# Altium PCB PCB_Sensor_v2.PcbDoc
Units mm, origin at the board's own origin, x right, y up, seen from the top; angles counter-clockwise.
Board outline 25 x 25 mm, 6 copper layers (Top Layer, ground, MidLayer1, MidLayer2, Power, Bottom Layer); 26 components, 45 nets, 144 pads, 68 vias.
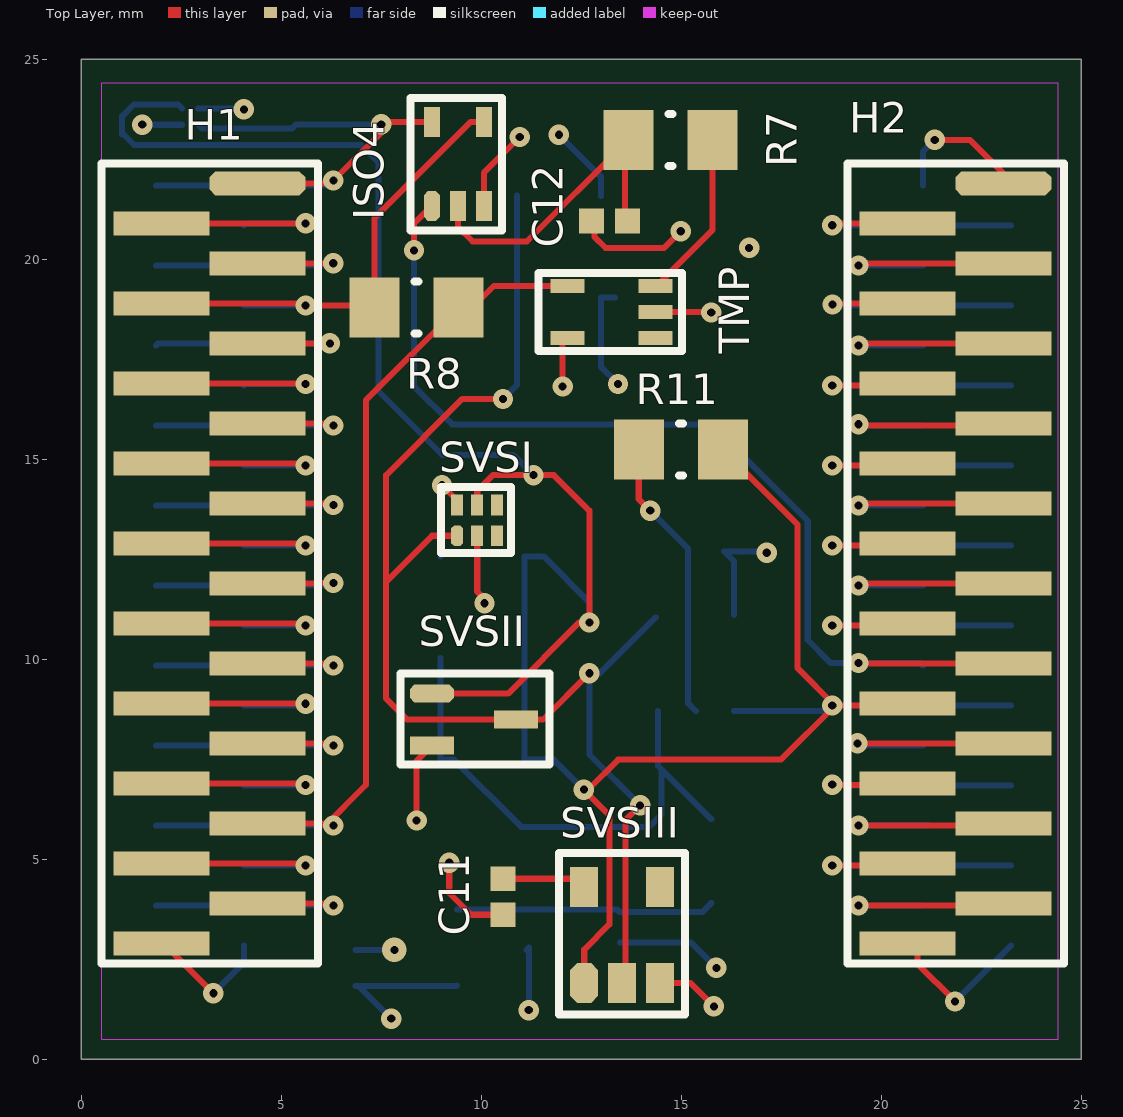
[diagram p0: Top Layer view]
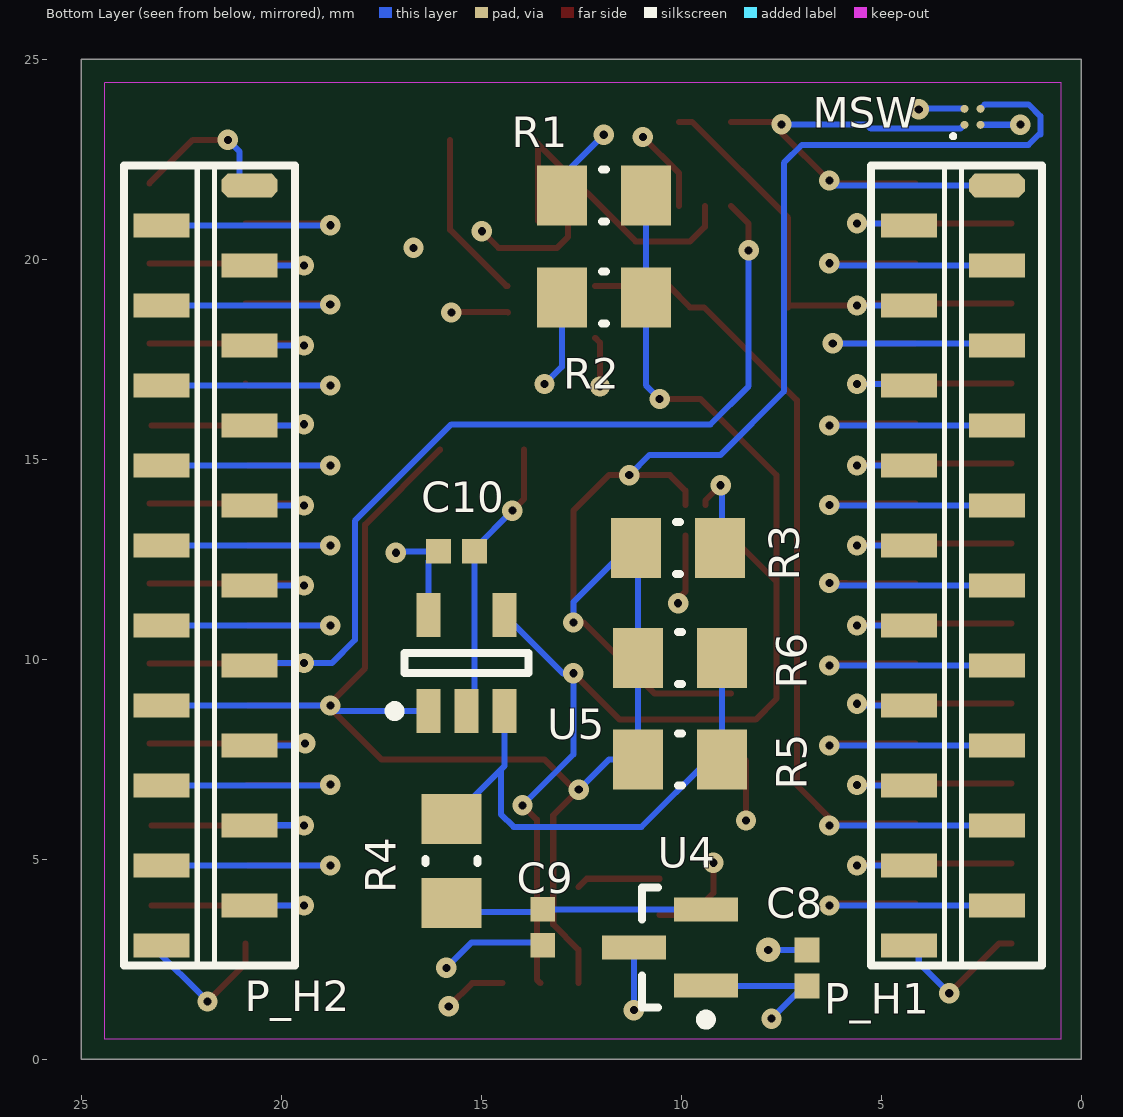
[diagram p1: Bottom Layer view, seen from below]
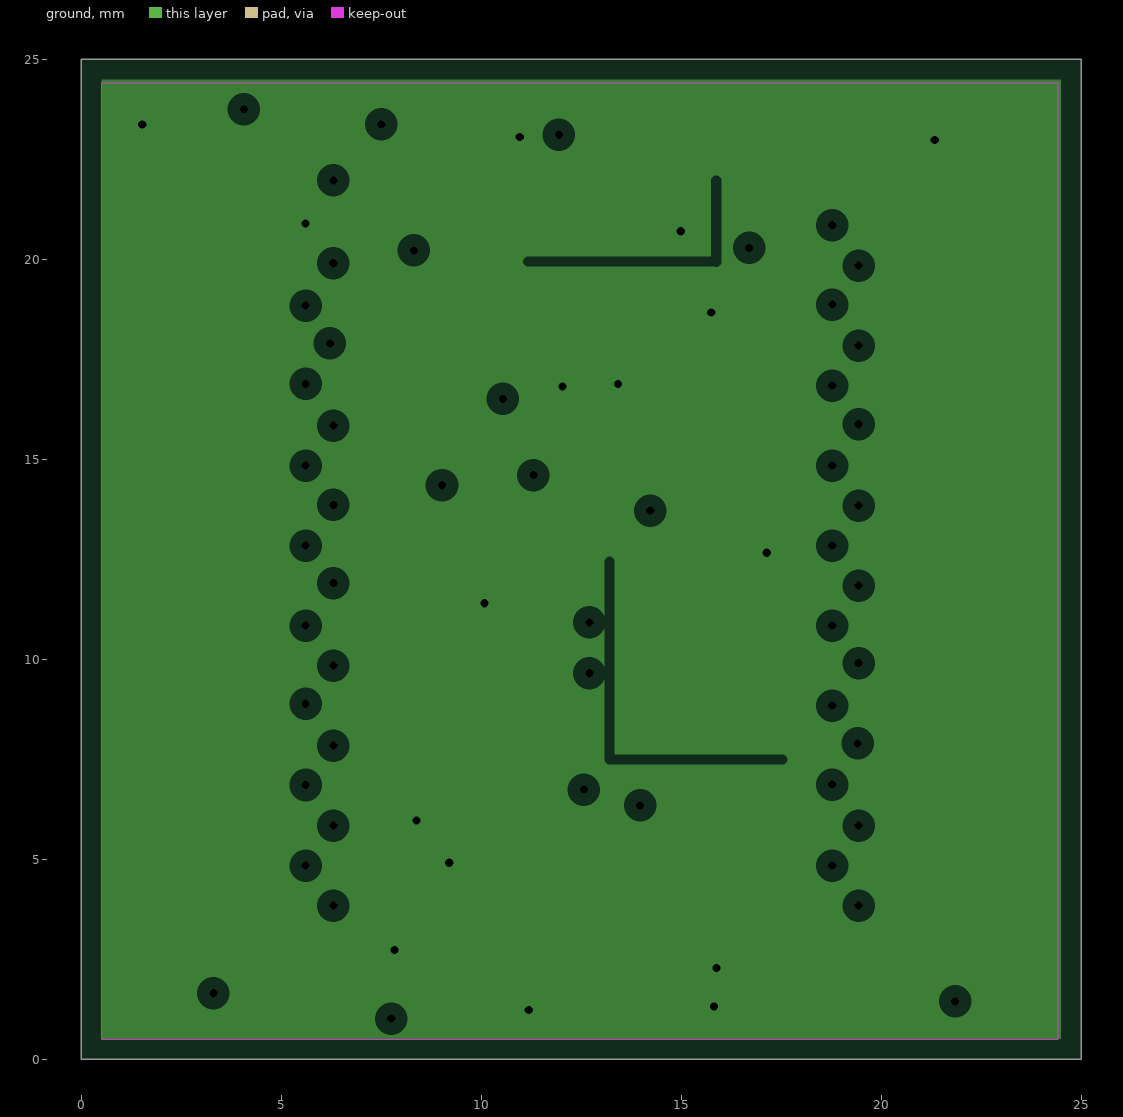
[diagram p2: ground, clearances drawn from the general rule]
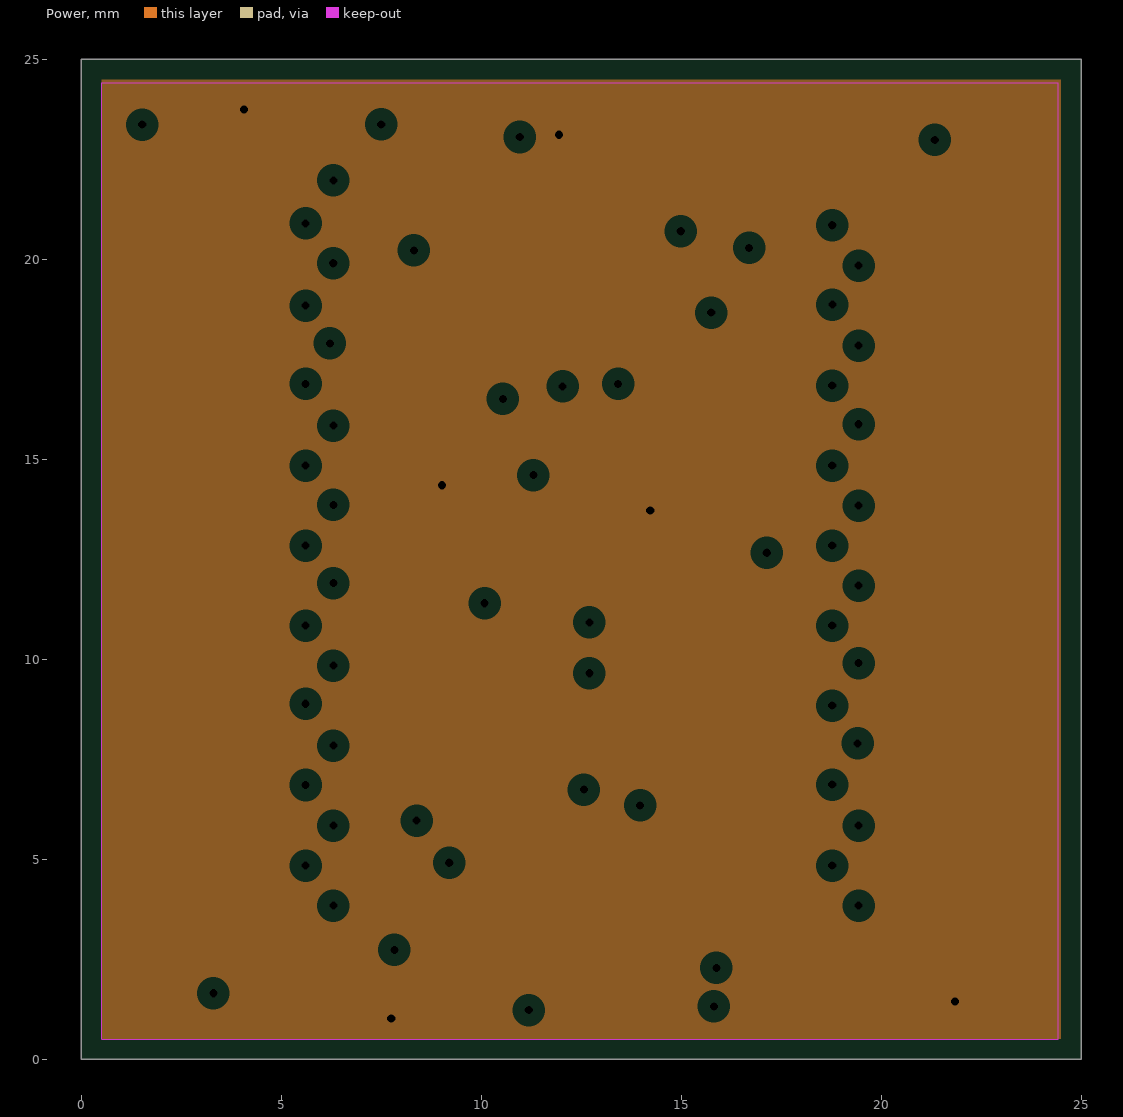
[diagram p3: Power, clearances drawn from the general rule]

## Layer stack, top to bottom
Top Layer: signal copper 0.0356
Dielectric: core 0.32, FR-4, Dk 4.8
ground: plane copper 0.0356, net GND
Dielectric: prepreg 0.32, FR-4, Dk 4.8
MidLayer1: signal copper 0.0356
Dielectric: core 0.32, FR-4, Dk 4.8
MidLayer2: signal copper 0.0356
Dielectric: prepreg 0.32, FR-4, Dk 4.8
Power: plane copper 0.0356, net E220
Dielectric: core 0.32, FR-4, Dk 4.8
Bottom Layer: signal copper 0.0356

## Board outline
0,0 25,0 25,25 0,25

## Design rules (kind name [scope] priority, off if disabled: settings)
Clearance "Clearance~Sunstone Circuits" [All] p1: gap=0.152 // Sunstone Circuits Minimum Clearance Rule (MLB~4&6 Layer Designs)
HoleSize "HoleSize~Sunstone Circuits" [All] p1: absolutevalues=TRUE maxlimit=6.375 minlimit=0.203 maxpercent=80.000 minpercent=20.000 // Sunstone Circuits Hole Size Rule (MLB~4&6 Layer Designs)
HoleSize Testpoint [All] p2: absolutevalues=TRUE maxlimit=2.54 minlimit=0.025 maxpercent=80.000 minpercent=20.000
HoleSize TestPointUsage [All] p3: absolutevalues=TRUE maxlimit=2.54 minlimit=0.025 maxpercent=80.000 minpercent=20.000
MinimumAnnularRing "MinimumAnnularRing~Sunstone Circuits" [All] p1: minimumring=0.152 // Sunstone Circuits Minimum Annular Ring (MLB~4&6 Layer Designs)
MinimumSolderMaskSliver [All] p1: minsoldermaskwidth=0.076
PlaneClearance "PlaneClearance~Sunstone Circuits" [All] p1: clearance=0.305 // Sunstone Circuits Power Plane Clearance Rule (MLB~4&6 Layer Designs)
PlaneConnect "PlaneConnect~Sunstone Circuits" [All] p1: planeconnectstyle=Relief reliefexpansion=0.254 reliefentries=4 reliefconductorwidth=0.203 reliefairgap=0.254 // Sunstone Circuits Power Plane Connect Rule (MLB~4&6 Layer Designs)
PolygonConnect "PolygonConnect~Sunstone Circuits" [All] p1: connectstyle=Relief reliefconductorwidth=0.203 reliefentries=4 polygonreliefangle="90 Angle" airgapwidth=0.254 // Sunstone Circuits Polygon Connect Style (MLB~4&6 Layer Designs)
RoutingVias "RoutingVias~Sunstone Circuits" [All] p1: holewidth=0.203 width=0.508 viastyle="Through Hole" minholewidth=0.203 minwidth=0.508 maxholewidth=0.203 maxwidth=0.508 // Sunstone Circuits Routing Vias Rule (MLB~4&6 Layer Designs)
ShortCircuit "ShortCircuit~Sunstone Circuits" [All] p1: allowed=FALSE // Sunstone Circuits Short Circuit Rule~Do Not Allow (MLB~4&6 Layer Designs)
SolderMaskExpansion "SolderMaskExpansion~Sunstone Circuits" [All] p1: expansion=0.076 // Sunstone Circuits Solder Mask Expansion Rule (MLB~4&6 Layer Designs)
ViasUnderSMD "ViasUnderSMD~Sunstone Circuits" [All] p1: allowed=FALSE // Sunstone Circuits Vias Under SMD~Do Not Allow (MLB~4&6 Layer Designs)
Width "Width~Sunstone Circuits" [All] p1: maxlimit=2.54 minlimit=0.152 preferedwidth=0.254 // Sunstone Circuits Minimum Width Rule (MLB~4&6 Layer Designs)
23 further rules are at their usual default settings.

## Classes and differential pairs
component class "Power Control": C8 C9 C10 MSW R1 R2 R3 R4 R5 R6 U4 U5
component class Sensor: C12 H1 H2 ISO4 P_H1 P_H2 R7 R8 TMP
component class SVS: C11 R11 SVSI SVSII SVSIII

## Components (designator, comment, footprint, x,y, rotation, side; value= is the part's Value field where it differs from the comment)
C8 "CAP 1uF 4V 0402(1005)" CAPC0402(1005)60_N 6.858,2.286 r270 bottom
C9 "CAP 1uF 4V 0402(1005)" CAPC0402(1005)60_N 13.462,3.302 r90 bottom
C10 "CAP 1uF 4V 0402(1005)" CAPC0402(1005)60_N 15.621,12.7 r180 bottom
C11 "CAP 1uF 4V 0402(1005)" CAPC0402(1005)60_N 10.541,4.064 r90 top
C12 "CAP 1uF 4V 0402(1005)" CAPC0402(1005)60_N 13.208,20.955 r0 top
H1 "Bus_Header_1" "Male Single row 20 pin header" 2,21.9 r0 top
H2 "Bus_Header_2" "Male Single row 20 pin header" 20.65,21.9 r0 top
ISO4 "ISL84715" ISL84715 8.763,21.336 r90 top
MSW "TPS22901" BGA4C40P2X2_76X76X50 2.724,23.533 r90 bottom
P_H1 "Bus_Header_1" "SMT 20 -pin single row female header" 4.314,21.844 r180 bottom
P_H2 "Bus_Header_2" "SMT 20 -pin single row female header" 22.991,21.844 r180 bottom
R1 "3R3 5% 0805(2012)" RESC0805(2012)_M 11.938,21.59 r180 bottom
R2 "3R3 5% 0805(2012)" RESC0805(2012)_M 11.938,19.05 r180 bottom
R3 "3R3 5% 0805(2012)" RESC0805(2012)_M 10.08,12.789 r180 bottom
R4 "3R3 5% 0805(2012)" RESC0805(2012)_M 15.748,4.953 r270 bottom
R5 "3R3 5% 0805(2012)" RESC0805(2012)_M 10.033,7.493 r180 bottom
R6 "3R3 5% 0805(2012)" RESC0805(2012)_M 10.033,10.033 r180 bottom
R7 "3R3 5% 0805(2012)" RESC0805(2012)_M 14.732,22.987 r0 top
R8 "3R3 5% 0805(2012)" RESC0805(2012)_M 8.382,18.796 r0 top
R11 "5R1 5% 0805(2012)" RESC0805(2012)_M 14.986,15.24 r0 top
SVSI "TPS3779" TPS3779 9.398,13.089 r90 top
SVSII "MAX6462" MAX6462 8.763,9.144 r0 top
SVSIII "NCP302" NCP302 12.573,1.905 r90 top
TMP "TMP20" TMP20 14.351,18.034 r180 top
U4 "REF3318AIDBZT" TI-DBZ3_N 10.287,2.794 r0 bottom
U5 "Comparator" SOT95P270X145-5N 15.367,9.906 r90 bottom

## Footprints (in the part's own frame and the unit in brackets; to place one, negate y for a bottom-side part, rotate by r counter-clockwise, add the part's x,y. Pads: shape width x height; smd on the part's side, far side on the other; paste and mask are expansions set on the pad)
BGA4C40P2X2_76X76X50 [mm] "BGA, 4-Leads, Body 0.76x0.76mmx0.50mm, Pitch 0.40mm"
  round 0.2 smd mask+0.102: A1(-0.171,0.196) A2(0.229,0.196) B1(-0.171,-0.204) B2(0.229,-0.204)
  silkscreen extent -0.51,0.43 -0.41,0.53, body extent -0.35,-0.38 0.41,0.38, height 0.5
CAPC0402(1005)60_N [mm] "Chip Capacitor, Body 1.0x0.5mm, Height 0.6mm, IPC Medium Density"
  rect 0.62x0.62 smd: 1(-0.45,0) 2(0.45,0)
  body extent -0.55,-0.3 0.55,0.3, height 0.6
ISL84715 [mm]
  oct 0.75x0.4 smd: 1(0,0)
  rect 0.75x0.4 smd: 2(0,-0.65) 3(0,-1.3) 4(2.1,-1.3) 5(2.1,0)
  silkscreen extent -0.61,-1.75 2.69,0.53
"Male Single row 20 pin header" [mm]
  oct 2.4x0.6 smd: 1(2.4,0)
  rect 2.4x0.6 smd: 2(0,-1) 3(2.4,-2) 4(0,-3) 5(2.4,-4) 6(0,-5) 7(2.4,-6) 8(0,-7) 9(2.4,-8) 10(0,-9) 11(2.4,-10) 12(0,-11) 13(2.4,-12) 14(0,-13) 15(2.4,-14) 16(0,-15) 17(2.4,-16) 18(0,-17) 19(2.4,-18) 20(0,-19)
  silkscreen extent -1.5,-19.5 3.91,0.5
MAX6462 [mm]
  oct 1.1x0.45 smd: 1(0,0)
  rect 1.1x0.45 smd: 2(0,-1.3) 3(2.1,-0.65)
  silkscreen extent -0.79,-1.78 2.95,0.5
NCP302 [mm]
  oct 1x0.7 smd: 1(0,0)
  rect 1x0.7 smd: 2(0,-0.95) 3(0,-1.9) 4(2.4,-1.9) 5(2.4,0)
  silkscreen extent -0.79,-2.51 3.25,0.64
RESC0805(2012)_M [mm] "Chip Resistor, Body 2.0x1.3mm, IPC Low Density"
  rect 1.25x1.5 smd: 1(-1.05,0) 2(1.05,0)
  silkscreen extent -0.05,-0.65 0.05,0.65, body extent -1.1,-0.67 1.1,0.67, height 0.7
"SMT 20 -pin single row female header" [mm]
  oct 1.4x0.6 smd: 1(2.2,0)
  rect 1.4x0.6 smd: 2(0,-1) 3(2.2,-2) 4(0,-3) 5(2.2,-4) 6(0,-5) 7(2.2,-6) 8(0,-7) 9(2.2,-8) 10(0,-9) 11(2.2,-10) 12(0,-11) 13(2.2,-12) 14(0,-13) 15(2.2,-14) 16(0,-15) 17(2.2,-16) 18(0,-17) 19(2.2,-18) 20(0,-19)
  silkscreen extent -0.94,-19.5 3.33,0.5, body extent -0.8,-19.4 3,0.4, height 2.1
SOT95P270X145-5N [mm] "SOT23, 5-Leads, Body 2.90x2.70mm, Pitch 0.95mm, IPC Medium Density"
  rect 1.1x0.6 smd: 1(-1.2,0.95) 2(-1.2,0) 3(-1.2,-0.95) 4(1.2,-0.95) 5(1.2,0.95)
  silkscreen extent -1.32,-1.55 0.25,1.93, body extent -0.9,-1.55 0.9,1.55, height 1.45
TI-DBZ3_N [mm] "SOT23, 3-Leads, Body 2.92x1.3 mm, Pitch 0.95 mm, IPC Medium Density"
  rect 1.6x0.6 smd: 1(-0.9,0.95) 2(-0.9,-0.95) 3(0.9,0)
  silkscreen extent -1.02,-1.5 0.7,1.92, body extent -0.7,-1.52 0.7,1.52, height 1.12
TMP20 [mm]
  rect 0.85x0.35 smd: 1(0,0) 2(0,-0.65) 3(0,-1.3) 4(2.2,-1.3) 5(2.2,0)
  silkscreen extent -0.66,-1.63 2.92,0.33
TPS3779 [mm]
  oct 0.52x0.3 smd mask+0.05: 1(0,0)
  rect 0.52x0.3 smd mask+0.05: 2(0,-0.5) 3(0,-1) 4(0.77,-1) 5(0.77,-0.5) 6(0.77,0)
  silkscreen extent -0.43,-1.35 1.22,0.41

## Part data
C8 C9 C10 C11 C12: library part CMP-1034-02111-1, "CAP 1uF 4V ±10% 0402 (1005 Metric) Thickness 0.6mm SMD"
R1 R2 R3 R4 R5 R6 R7 R8: library part CMP-1013-00014-1, "3R3 0.125W 5% 0805 (2012 Metric)  SMD"
R11: library part CMP-1013-00019-1, "5R1 0.125W 5% 0805 (2012 Metric)  SMD"
U4: library part CMP-0367-00129-1, "30 ppm / degC Drift, 3.9 uA Voltage Reference, -40 to 125 degC, 3-pin SOT-23 (DBZ), Green (RoHS & no Sb/Br)"

## Via types
v1: diameter 0.508, hole 0.203, Top Layer to Bottom Layer, 67 vias
v2: diameter 0.61, hole 0.203, Top Layer to Bottom Layer, 1 vias

## Nets (pads, with @x,y where several pads share a name; then routed paths per layer and width w, separated by ;. In a path a pad name is that pad's centre, name@x,y a point inside that pad or via, vN(x,y) a via of type N, cw(c..) or ccw(c..) an arc to the next point about the centre after c; other vN are vias at no path point)
1.8VREF: C9.2 R4.2 U4.2 | length 6.5
  Bottom Layer w0.152: U4.2 13.4,3.744 13.462,3.682 15.527,3.682 R4.2
E118: H1.18 P_H1.18 | length 5.6
  Top Layer w0.152: H1.18@1.75,4.9 H1.18 v1@5.659,4.9
  Bottom Layer w0.152: P_H1.18@4.064,4.844 P_H1.18 v1(5.607,4.844) v1@5.715,4.844
E119: H1.19 P_H1.19 | length 6.3
  Top Layer w0.152: H1.19@4.15,3.9 H1.19 v1@6.133,3.9
  Bottom Layer w0.152: P_H1.19@1.864,3.844 P_H1.19 v1@6.189,3.844
  other v1: 6.3,3.844
E120: H1.20 P_H1.20 | length 3.6
  Top Layer w0.152: H1.20@1.75,2.9 H1.20 2.053,2.9 v1(3.302,1.651)
  Bottom Layer w0.152: v1(3.302,1.651) 4.064,2.413 P_H1.20@4.064,2.844
E218: H2.18 P_H2.18 | length 6.5
  Top Layer w0.152: v1@18.778,4.844 H2.18@20.844,4.844
  Bottom Layer w0.152: v1@18.778,4.844 P_H2.18 P_H2.18@23.241,4.844
  other v1: 18.774,4.844
E219: H2.19 P_H2.19 | length 5.4
  Top Layer w0.152: v1(19.431,3.844) H2.19@23.244,3.844
  Bottom Layer w0.152: v1(19.431,3.844) P_H2.19 P_H2.19@21.041,3.844
E220: C8.2 C10.2 H2.20 MSW.A2 P_H2.20 R1.1 R3.2 R11.1 SVSI.6 U4.1 U5.2 | length 20.2
  Top Layer w0.152: v1(9.017,14.351) 9.398,13.97 SVSI.6 ; R11.1 13.936,14.004 v1(14.224,13.716) ; H2.20@20.9,2.9 20.9,2.391 v1(21.844,1.447)
  Bottom Layer w0.152: MSW.A2@2.921,23.768 4.045,23.768 v1(4.064,23.749) ; C8.2 C8.2@6.927,1.836 ; v1(7.747,1.016) C8.2@6.927,1.836 ; R3.2@8.983,12.573 8.983,14.317 v1(9.017,14.351) ; U4.1 9.379,1.836 C8.2@6.927,1.836 ; v1(11.938,23.114) 12.988,22.064 R1.1 ; v1(14.224,13.716) 15.171,12.769 C10.2 15.171,8.902 U5.2 ; v1(21.844,1.447) P_H2.20@23.241,2.844
EH_VCC: H1.1 ISO4.5 MSW.A1 P_H1.1 | length 14.2
  Top Layer w0.152: H1.1@4.15,21.9 H1.1 v1@6.3,21.9 ; v1(6.3,21.971) 7.497,23.168 v1(7.497,23.373) ; v1@7.561,23.436 ISO4.5
  Bottom Layer w0.152: P_H1.1@1.864,21.844 P_H1.1 v1@6.173,21.844 ; MSW.A1@2.948,23.341 3.023,23.266 5.261,23.266 5.368,23.373 v1(7.497,23.373)
GND: C8.1 C9.1 C10.1 C11.1 C12.1 H1.2 H2.1 ISO4.3 MSW.B1 P_H1.2 P_H2.1 R2.1 SVSI.2 SVSII.2 SVSIII.3 TMP.2 TMP.5 U4.3 U5.5 | length 36.4
  Top Layer w0.152: H1.2@1.75,20.9 H1.2 v1(5.607,20.9) 5.643,20.9 v1@5.715,20.828 ; v1(8.382,5.969) 8.382,7.463 SVSII.2 ; v1(9.198,4.914) 9.198,4.158 9.742,3.614 C11.1 ; SVSI.2 9.898,11.692 10.017,11.573 10.017,11.592 10.08,11.529 v1(10.08,11.403) ; ISO4.3 10.063,22.159 v1(10.962,23.058) ; v1(12.033,16.821) 12.033,17.916 TMP.5 ; C12.1@12.828,20.955 12.828,20.562 13.104,20.286 14.571,20.286 v1(14.986,20.701) ; TMP.2@14.336,18.669 TMP.2 15.733,18.684 v1(15.748,18.669) ; SVSIII.3 15.231,1.905 v1(15.813,1.323) ; v1(21.336,22.987) 22.213,22.987 H2.1@23.3,21.9
  Bottom Layer w0.152: v1(1.524,23.368) 1.528,23.364 MSW.B1@2.514,23.364 ; P_H1.2@4.064,20.844 4.12,20.9 v1(5.607,20.9) v1@5.643,20.9 ; C8.1 v2(7.828,2.736) ; U4.3@11.129,2.736 U4.3 v1(11.187,1.23) ; R2.1@13.335,19.05 R2.1 12.988,17.315 v1(13.419,16.884) ; C9.1@13.462,2.922 15.239,2.922 v1(15.875,2.286) ; U5.5 16.317,12.454 C10.1 17.099,12.7 v1(17.136,12.663) ; P_H2.1@21.041,21.844 21.041,22.692 v1(21.336,22.987)
N10: H1.15 P_H1.15 | length 6.3
  Top Layer w0.152: H1.15@4.15,7.9 H1.15 v1@6.137,7.9
  Bottom Layer w0.152: P_H1.15@1.864,7.844 P_H1.15 v1@6.193,7.844
  other v1: 6.3,7.844
N11: H1.13 P_H1.13 | length 6.3
  Top Layer w0.152: H1.13@4.15,9.9 H1.13 v1@6.3,9.9
  Bottom Layer w0.152: P_H1.13@1.864,9.844 P_H1.13 6.034,9.844
  other v1: 6.3,9.844
N12: H1.14 P_H1.14 | length 5.6
  Top Layer w0.152: H1.14@1.75,8.9 H1.14 v1@5.705,8.9
  Bottom Layer w0.152: P_H1.14@4.064,8.844 P_H1.14 v1@5.669,8.844
  other v1: 5.607,8.89
N13: H2.13 ISO4.1 P_H2.13 | length 26
  Top Layer w0.152: v1(8.316,20.223) 8.316,20.889 ISO4.1 ; v1@19.431,9.9 H2.13 H2.13@23.3,9.9
  Bottom Layer w0.152: v1@8.316,20.32 v1(8.316,20.223) 8.316,16.83 9.271,15.875 15.748,15.875 18.161,13.462 18.161,10.483 18.738,9.906 v1(19.431,9.906) 20.979,9.906 P_H2.13@21.041,9.844
N14: H2.14 MSW.B2 P_H2.14 R3.1 R5.1 R6.1 R11.2 SVSI.5 SVSII.1 SVSIII.1 U5.1 | length 68.9
  Top Layer w0.152: SVSII.1 10.668,9.144 12.446,10.922 v1(12.7,10.922) 12.7,13.716 11.811,14.605 v1(11.303,14.605) 10.287,14.605 9.898,14.216 SVSI.5 ; SVSIII.1 12.573,2.743 13.202,3.373 13.202,6.102 v1(12.563,6.741) 12.667,6.741 13.419,7.493 17.491,7.493 v1@18.842,8.844 ; R11.2 17.907,13.369 17.907,9.779 v1@18.842,8.844 ; H2.14@20.844,8.844 v1@18.842,8.844
  Bottom Layer w0.152: MSW.B2@2.516,23.773 2.419,23.87 1.316,23.87 1.022,23.576 1.022,23.121 1.061,23.121 1.323,22.858 6.987,22.858 7.434,22.411 7.434,16.696 9.017,15.113 10.795,15.113 v1(11.303,14.605) ; v1(12.563,6.741) 11.811,7.493 R5.1 R6.1 11.083,12.573 11.557,12.573 12.7,11.43 v1(12.7,10.922) ; U5.1 18.704,8.706 18.842,8.844 P_H2.14 P_H2.14@23.241,8.844
  other v1: 18.774,8.844
N15: H1.16 P_H1.16 | length 5.6
  Top Layer w0.152: H1.16@1.75,6.9 H1.16 v1@5.673,6.9
  Bottom Layer w0.152: P_H1.16@4.064,6.844 P_H1.16 v1@5.701,6.844
  other v1: 5.607,6.858
N16: H2.9 P_H2.9 | length 5.4
  Top Layer w0.152: v1@19.487,13.9 H2.9 H2.9@23.3,13.9
  Bottom Layer w0.152: v1(19.431,13.844) P_H2.9 P_H2.9@21.041,13.844
N17: H2.10 P_H2.10 | length 6.3
  Top Layer w0.152: v1@18.906,12.844 H2.10@20.844,12.844
  Bottom Layer w0.152: v1@18.906,12.844 P_H2.10 P_H2.10@23.241,12.844
  other v1: 18.774,12.844
N20: H1.10 P_H1.10 | length 5.4
  Top Layer w0.152: H1.10@1.75,12.9 H1.10 v1@5.607,12.9
  Bottom Layer w0.152: P_H1.10@4.064,12.844 P_H1.10 v1(5.607,12.844)
N21: H1.9 P_H1.9 | length 6.6
  Top Layer w0.152: H1.9@4.15,13.9 H1.9 6.26,13.9 v1(6.3,13.86)
  Bottom Layer w0.152: P_H1.9@1.864,13.844 P_H1.9 6.284,13.844 v1(6.3,13.86)
N22: H1.12 P_H1.12 | length 5.7
  Top Layer w0.152: H1.12@1.75,10.9 H1.12 v1@5.708,10.9
  Bottom Layer w0.152: P_H1.12@4.064,10.844 P_H1.12 v1(5.607,10.844) v1@5.764,10.844
N23: H2.5 P_H2.5 | length 5.4
  Top Layer w0.152: v1@19.487,17.9 H2.5 H2.5@23.3,17.9
  Bottom Layer w0.152: v1(19.431,17.844) P_H2.5 P_H2.5@21.041,17.844
N24: H2.6 P_H2.6 | length 6.2
  Top Layer w0.152: v1@18.97,16.844 20.844,16.844 H2.6@20.9,16.9
  Bottom Layer w0.152: v1@18.97,16.844 P_H2.6 P_H2.6@23.241,16.844
  other v1: 18.774,16.844
N25: H2.8 P_H2.8 | length 6.5
  Top Layer w0.152: v1@18.811,14.844 H2.8@20.844,14.844
  Bottom Layer w0.152: v1@18.811,14.844 P_H2.8 P_H2.8@23.241,14.844
  other v1: 18.774,14.844
N26: H2.7 P_H2.7 | length 5.6
  Top Layer w0.152: v1@19.341,15.876 19.373,15.844 H2.7@23.244,15.844
  Bottom Layer w0.152: v1@19.341,15.876 19.373,15.844 P_H2.7 P_H2.7@21.041,15.844
  other v1: 19.431,15.876
N27: H2.4 P_H2.4 | length 6.3
  Top Layer w0.152: 19.058,18.9 H2.4 H2.4@20.9,18.9
  Bottom Layer w0.152: v1@18.796,18.796 18.844,18.844 P_H2.4 P_H2.4@23.241,18.844
  other v1: 18.778,18.87
N30: H2.3 P_H2.3 | length 5.4
  Top Layer w0.152: v1@19.487,19.9 H2.3 H2.3@23.3,19.9
  Bottom Layer w0.152: v1(19.431,19.844) P_H2.3 P_H2.3@21.041,19.844
N31: H2.2 P_H2.2 | length 6.6
  Top Layer w0.152: v1@18.774,20.9 H2.2 H2.2@20.9,20.9
  Bottom Layer w0.152: v1(18.774,20.853) 18.783,20.844 P_H2.2 P_H2.2@23.241,20.844
N32: H1.7 P_H1.7 | length 6.4
  Top Layer w0.152: H1.7@4.15,15.9 H1.7 6.244,15.9 v1(6.3,15.844)
  Bottom Layer w0.152: P_H1.7@1.864,15.844 P_H1.7 v1@6.065,15.844
N33: H1.11 P_H1.11 | length 6.4
  Top Layer w0.152: H1.11@4.15,11.9 H1.11 5.859,11.9 5.866,11.907 v1@6.174,11.907
  Bottom Layer w0.152: P_H1.11@1.864,11.844 P_H1.11 6.111,11.844 v1@6.174,11.907
  other v1: 6.3,11.907
N34: H1.6 P_H1.6 | length 5.4
  Top Layer w0.152: H1.6@1.75,16.9 H1.6 v1@5.607,16.9
  Bottom Layer w0.152: P_H1.6@4.064,16.844 4.104,16.884 v1(5.607,16.884)
N35: H2.16 P_H2.16 | length 6.2
  Top Layer w0.152: v1@18.837,6.867 18.846,6.858 H2.16@20.858,6.858
  Bottom Layer w0.152: 19.05,6.844 P_H2.16 P_H2.16@23.241,6.844
  other v1: 18.774,6.867
N36: H2.15 P_H2.15 | length 5.7
  Top Layer w0.152: v1(19.405,7.9) H2.15 H2.15@23.3,7.9
  Bottom Layer w0.152: v1@19.304,8.001 v1(19.405,7.9) 19.461,7.844 P_H2.15 P_H2.15@21.041,7.844
N37: H1.5 P_H1.5 | length 6.4
  Top Layer w0.152: H1.5@4.15,17.9 H1.5 v1(6.214,17.9)
  Bottom Layer w0.152: P_H1.5@1.864,17.844 1.92,17.9 v1(6.214,17.9)
N40: H1.3 P_H1.3 | length 6.3
  Top Layer w0.152: H1.3@4.15,19.9 H1.3 v1@6.298,19.9
  Bottom Layer w0.152: P_H1.3@1.864,19.844 P_H1.3 6.047,19.844 6.048,19.845
  other v1: 6.299,19.901
N41: H1.4 ISO4.4 P_H1.4 R8.1 | length 13.1
  Top Layer w0.152: H1.4@1.75,18.9 H1.4 v1@5.707,18.9 ; v1@5.763,18.844 R8.1@7.284,18.844 ; R8.1 7.332,21.035 9.733,23.436 ISO4.4
  Bottom Layer w0.152: P_H1.4@4.064,18.844 P_H1.4 v1(5.607,18.844) v1@5.763,18.844
N42: H2.11 P_H2.11 | length 5.7
  Top Layer w0.152: v1@19.36,11.9 H2.11 H2.11@23.3,11.9
  Bottom Layer w0.152: v1@19.304,11.844 v1(19.431,11.844) P_H2.11 P_H2.11@21.041,11.844
N43: H1.8 P_H1.8 | length 5.4
  Top Layer w0.152: H1.8@1.75,14.9 H1.8 v1@5.607,14.9
  Bottom Layer w0.152: P_H1.8@4.064,14.844 P_H1.8 v1(5.607,14.844)
N44: H2.12 P_H2.12 | length 6.1
  Top Layer w0.152: v1@18.971,10.844 H2.12@20.844,10.844
  Bottom Layer w0.152: v1@19.001,10.844 P_H2.12 P_H2.12@23.241,10.844
  other v1: 18.774,10.844
N45: H2.17 P_H2.17 | length 5.6
  Top Layer w0.152: v1@19.487,5.9 v1(19.431,5.844) H2.17@23.244,5.844
  Bottom Layer w0.152: v1@19.444,5.853 P_H2.17@21.16,5.853
NetC11_2: C11.2 SVSIII.5 | length 2.1
  Top Layer w0.152: C11.2 12.364,4.514 SVSIII.5
NetR4_1: R4.1 R5.2 R6.2 U5.3 | length 13.3
  Bottom Layer w0.152: R6.2 R5.2 9.313,7.493 10.995,5.811 14.193,5.811 14.509,6.127 14.509,7.242 ; U5.3 14.417,7.334 14.509,7.242 ; R4.1 14.509,7.242
NetR7_2: R7.2 TMP.3 | length 4.3
  Top Layer w0.152: TMP.3 14.382,19.334 15.782,20.734 R7.2
ON13: C12.2 ISO4.2 R7.1 | length 7.9
  Top Layer w0.152: ISO4.2 9.413,20.813 9.779,20.447 11.142,20.447 R7.1@13.588,22.893 ; C12.2@13.588,20.955 R7.1@13.588,22.893 ; R7.1 R7.1@13.588,22.893
SENSE_POINT: R1.2 R2.2 SVSI.1 SVSII.3 SVSIII.2 U5.4 | length 33.2
  Top Layer w0.152: SVSI.1 8.771,13.089 7.62,11.938 ; v1(10.541,16.51) 9.525,16.51 7.62,14.605 7.62,11.938 ; v1(12.7,9.652) 11.542,8.494 SVSII.3 8.143,8.494 7.62,9.017 7.62,11.938 ; SVSIII.2 13.609,1.991 13.609,5.989 v1(13.97,6.35)
  Bottom Layer w0.152: v1(10.541,16.51) 10.888,16.857 R2.2 R1.2 ; v1(13.97,6.35) 12.7,7.62 v1(12.7,9.652) 12.963,9.652 U5.4@14.36,11.049
VCC_SENSE: H1.17 P_H1.17 R8.2 TMP.4 | length 23.4
  Top Layer w0.152: H1.17@4.15,5.9 H1.17 6.042,5.9 ; v1@6.098,5.844 7.112,6.858 7.112,16.476 R8.2 9.779,18.796 10.317,19.334 TMP.4
  Bottom Layer w0.152: P_H1.17@1.864,5.844 P_H1.17 v1@6.098,5.844
  other v1: 6.3,5.844
pads on no net: SVSI.3 SVSI.4 SVSIII.4 TMP.1
copper on no net:
  other v1: 16.695,20.286

## Polygon pours and split planes (outlines as drawn)
GND on ground (split plane): 24.49,0.51 0.51,0.51 0.51,24.49 24.49,24.49
E220 on Power (split plane): 24.49,0.51 0.51,0.51 0.51,24.49 24.49,24.49

## Keep-outs
Keep-Out Layer:
  lines w0.025: 0.508,0.508 24.42,0.508 24.42,24.42 0.508,24.42 0.508,0.508

## Other copper
ground (plane layer: these items are gaps in the copper):
  lines w0.254: 11.168,19.943 15.105,19.943 15.875,19.939 15.875,21.971 ; 13.208,12.446 13.208,7.493 17.526,7.493

## Silkscreen, mask and mechanical layers (free items; w line width, h text height)
Mechanical 3:
  the board outline again, w0.254

## Dimensions
0,-0.025 to 25,0 on Mechanical 1
0,0 to 0,25 on Mechanical 1